# Altium PCB PCB1.PcbDoc (part 1 of 2)
Units mil, origin at the board's own origin, x right, y up, seen from the top; angles counter-clockwise.
Board outline 6000 x 4000 mil, 2 copper layers (Top Layer, Bottom Layer); 229 components, 170 nets, 796 pads, 0 vias.
Unrouted connection lines stored in the file: 461.
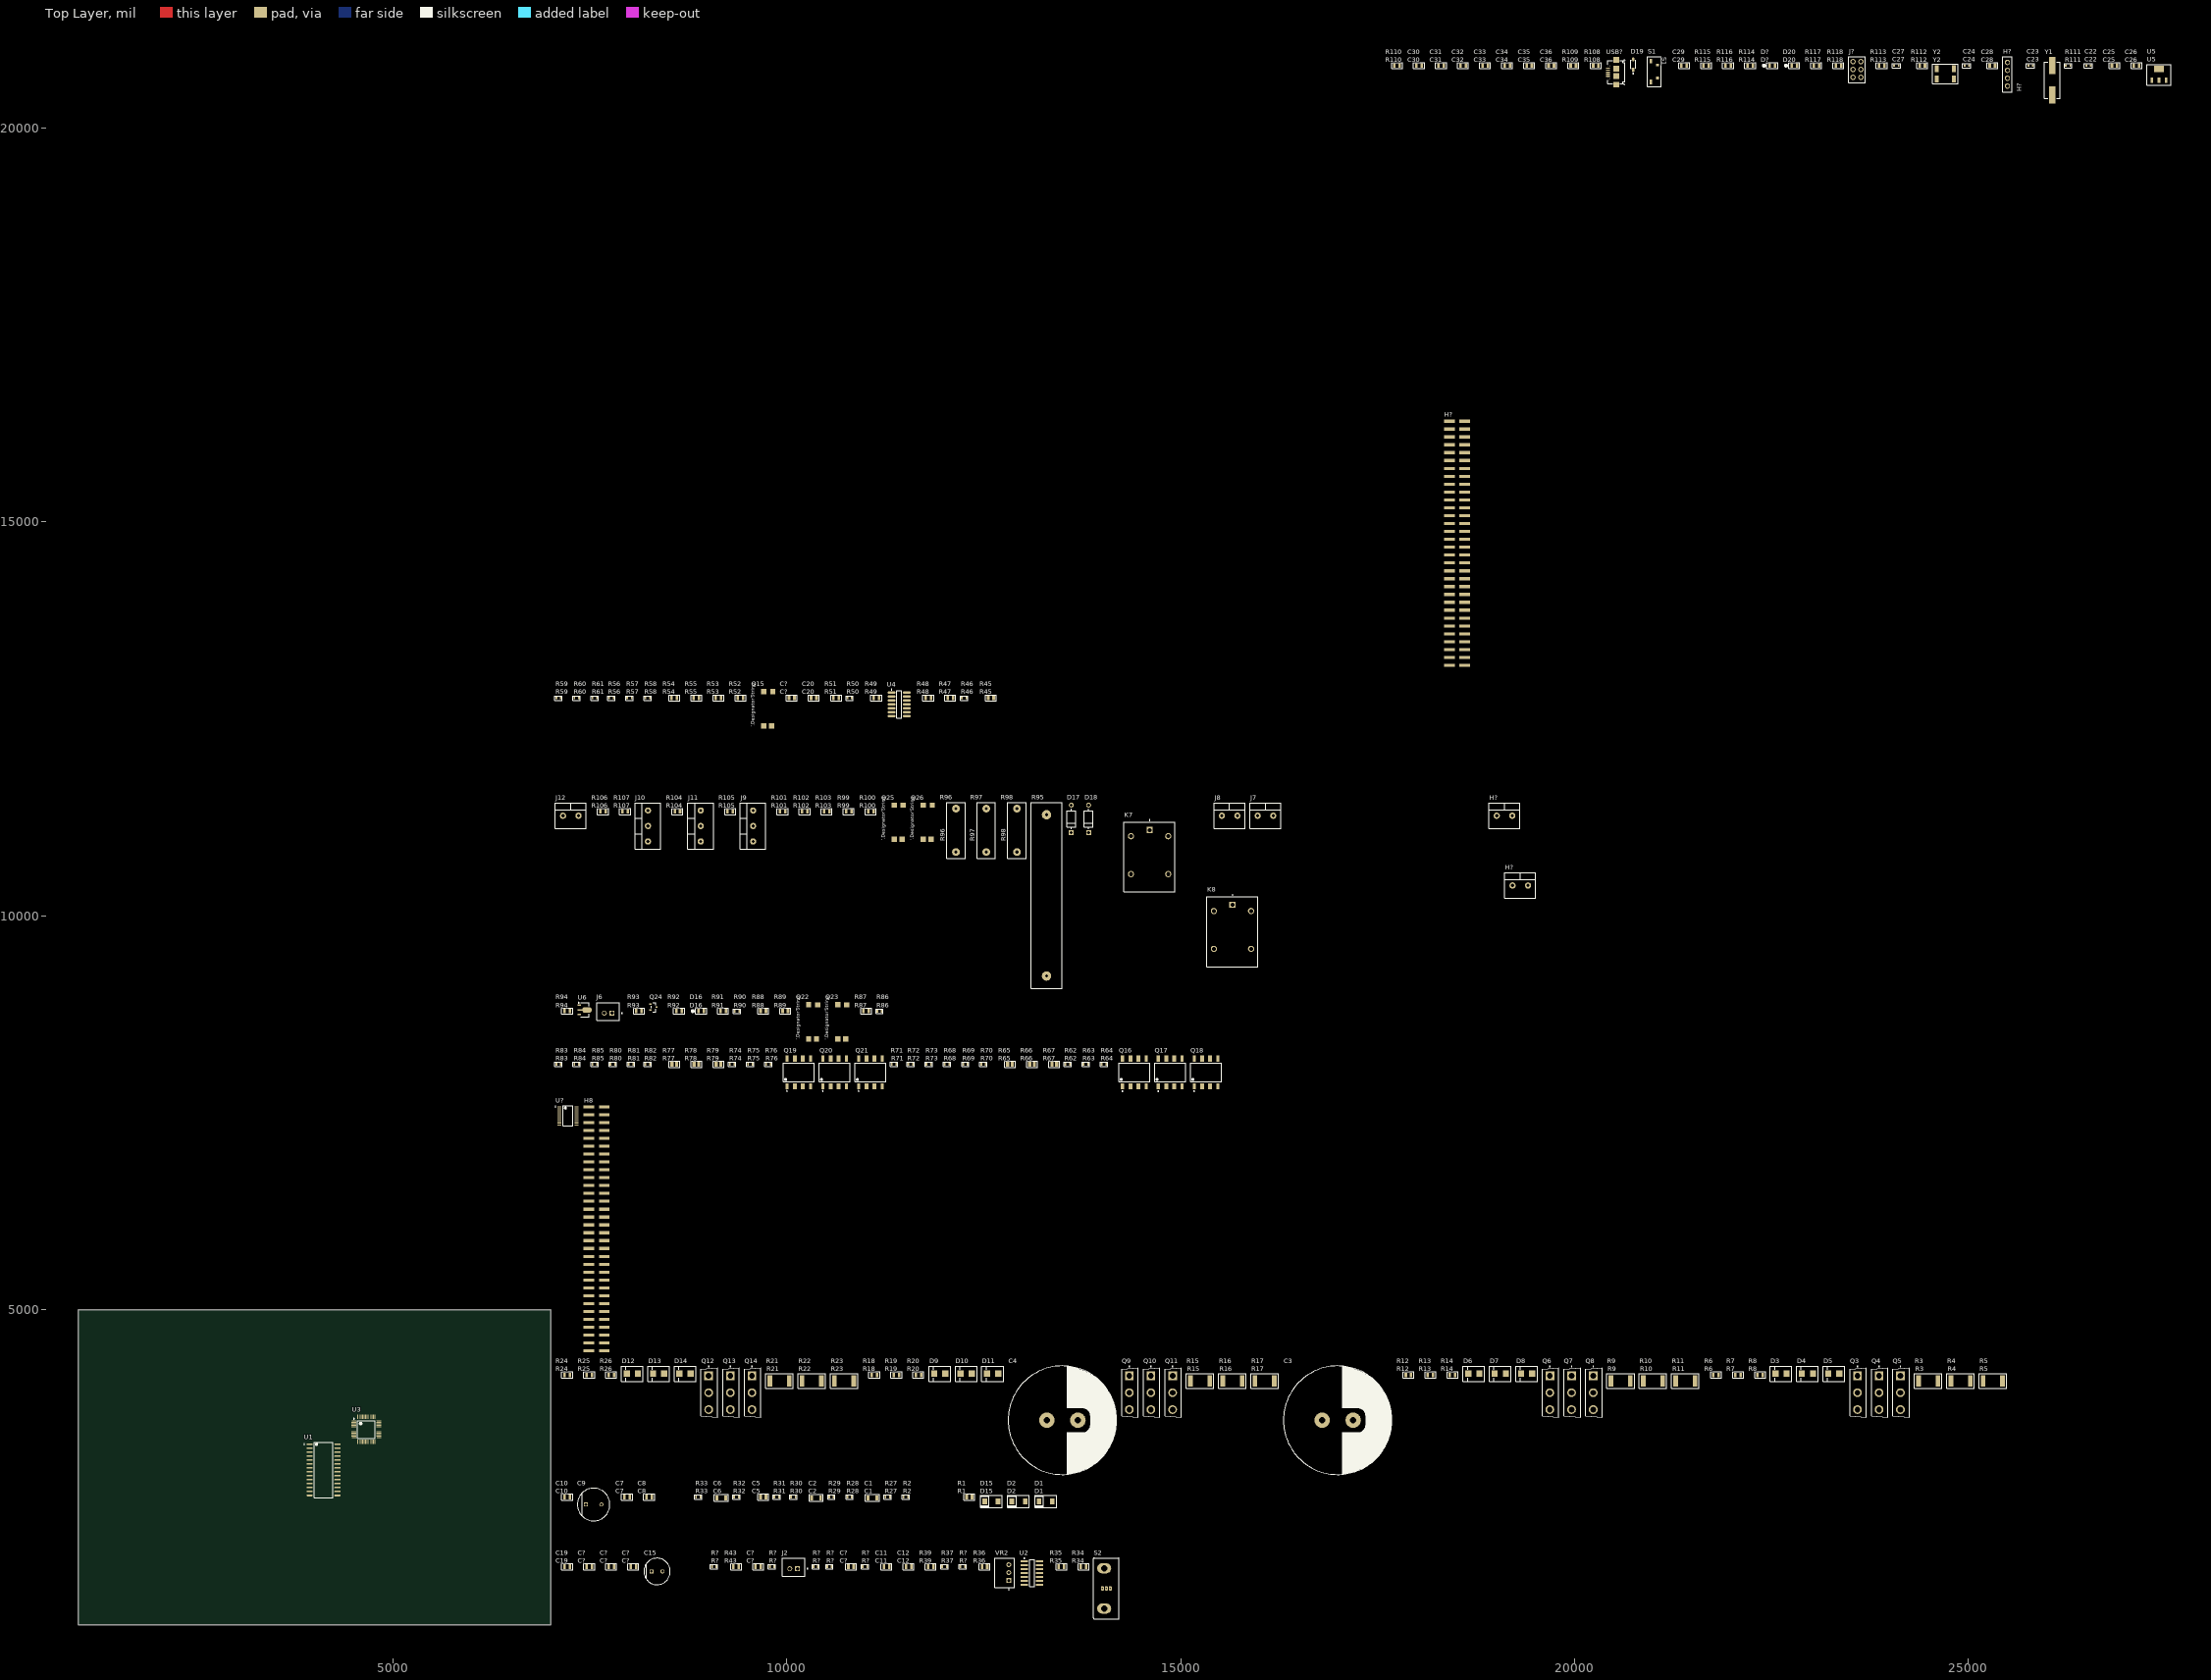
[diagram p0: Top Layer view]
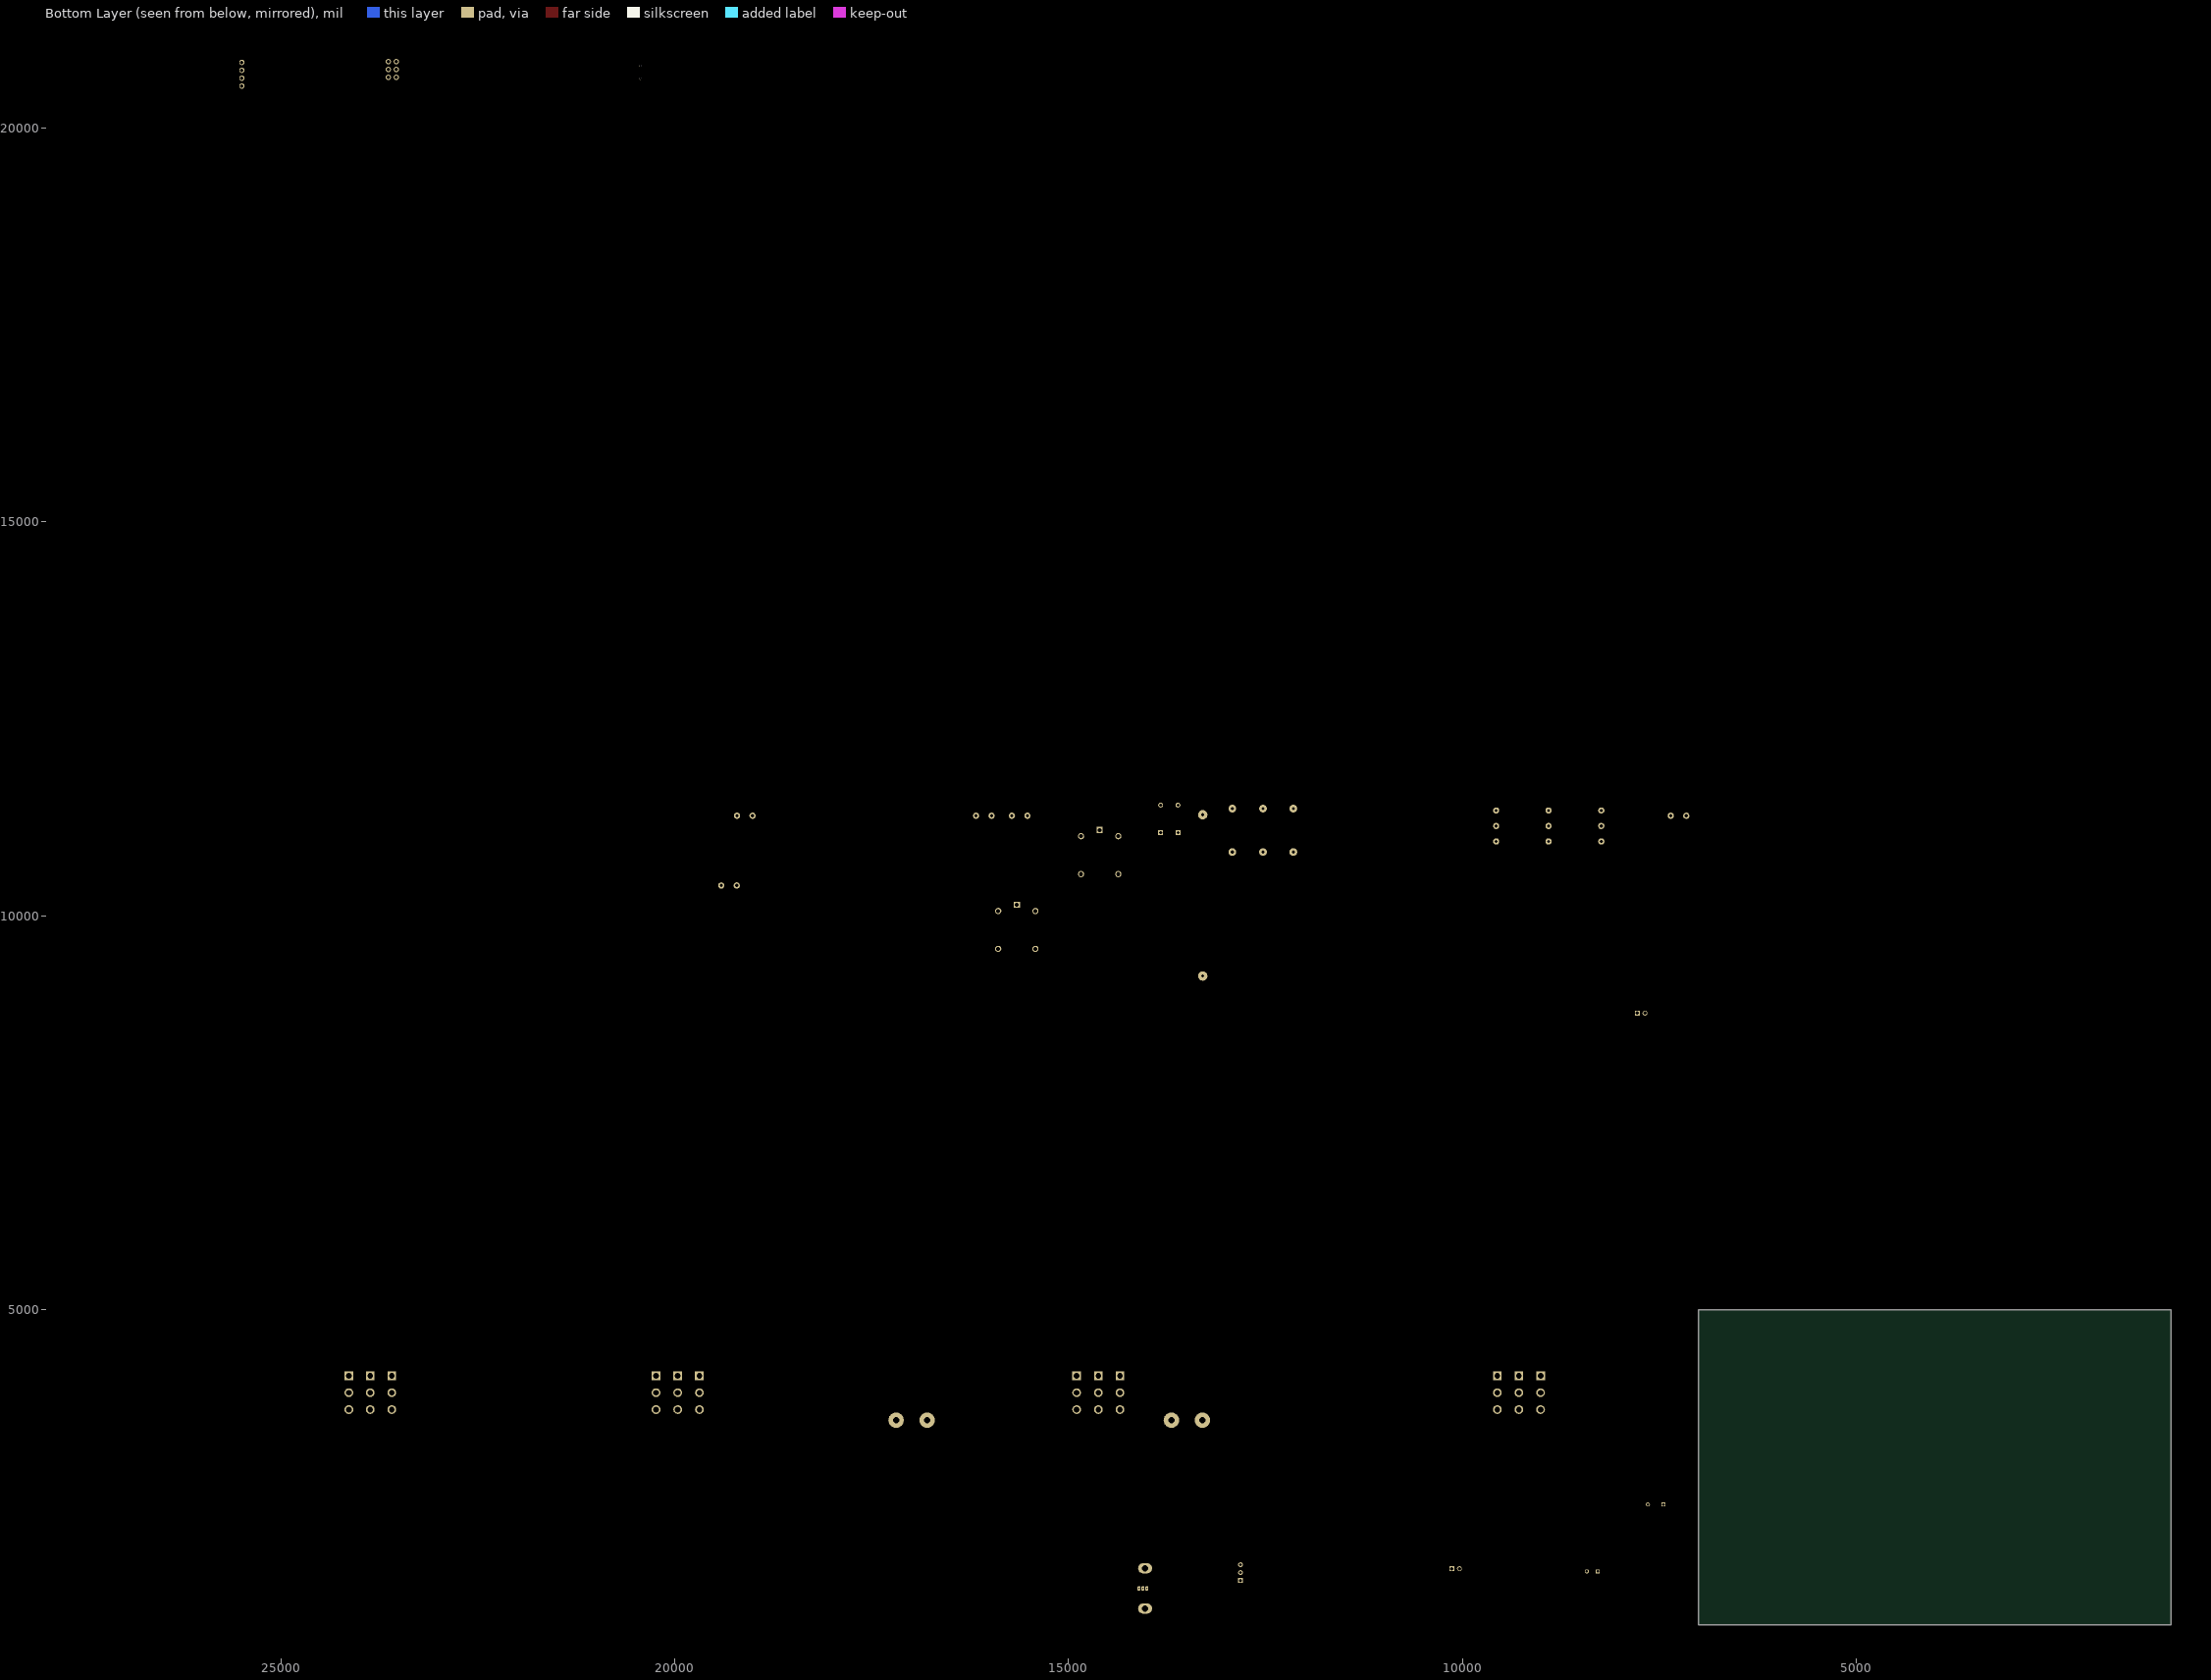
[diagram p1: Bottom Layer view, seen from below]

## Layer stack, top to bottom
Top Solder: solder mask 0.4, Solder Resist, Dk 3.5
Top Layer: signal copper 1.4
Dielectric 1: dielectric 12.6, FR-4, Dk 4.8
Bottom Layer: signal copper 1.4
Bottom Solder: solder mask 0.4, Solder Resist, Dk 3.5

## Board outline
1000,1000 7000,1000 7000,5000 1000,5000

## Design rules (kind name [scope] priority, off if disabled: settings)
Clearance [All] p1: gap=10 ignorepadtopadclearanceinfootprint=FALSE except(0: Arc-Hole Track-Hole SMDPad-Hole THPad-Hole Via-Hole Fill-Hole Poly-Hole Region-Hole Text-Hole)
PolygonConnect [All] p1: connectstyle=Relief reliefconductorwidth=10 reliefentries=4 polygonreliefangle="90 Angle" airgapwidth=10
RoomDefinition Voltage_measurement [InComponentClass('Voltage_measurement')] p1: confinementstyle=ConfineIn formatcopy=TRUE lockcomponents=FALSE outline 7045,1685 12670,1685 12670,12990 7045,12990
RoomDefinition stm32 [InComponentClass('stm32')] p2: confinementstyle=ConfineIn formatcopy=TRUE lockcomponents=FALSE outline 17579.88,10210 28019.88,10210 28019.88,21020 17579.88,21020
RoomDefinition "Precharge circuit" [InComponentClass('Precharge circuit')] p3: confinementstyle=ConfineIn formatcopy=TRUE lockcomponents=FALSE outline 7045,9065 16285,9065 16285,11550 7045,11550
RoomDefinition Optocouplers [InComponentClass('Optocouplers')] p4: confinementstyle=ConfineIn formatcopy=TRUE lockcomponents=FALSE outline 7045,7755 15530,7755 15530,8340 7045,8340
RoomDefinition optocouplers2 [InComponentClass('optocouplers2')] p5: confinementstyle=ConfineIn formatcopy=TRUE lockcomponents=FALSE outline 7045,8390 11315,8390 11315,9015 7045,9015
RoomDefinition mcu [InComponentClass('mcu')] p6: confinementstyle=ConfineIn formatcopy=TRUE lockcomponents=FALSE outline 7045,1505 15155,1505 15155,12315 7045,12315
RoomDefinition HV_Side [InComponentClass('HV_Side')] p7: confinementstyle=ConfineIn formatcopy=TRUE lockcomponents=FALSE outline 7045,2895 25495,2895 25495,4395 7045,4395
RoomDefinition Gate_Driver [InComponentClass('Gate_Driver')] p8: confinementstyle=ConfineIn formatcopy=TRUE lockcomponents=FALSE outline 7045,1505 15155,1505 15155,12315 7045,12315
RoomDefinition Current_measurement [InComponentClass('Current_measurement')] p9: confinementstyle=ConfineIn formatcopy=TRUE lockcomponents=FALSE outline 7045,1060 15155,1060 15155,12990 7045,12990
RoutingVias [All] p1: holewidth=28 width=50 viastyle="Through Hole" minholewidth=28 minwidth=50 maxholewidth=28 maxwidth=50
SolderMaskExpansion [All] p1: expansion=4 istentingtop=FALSE
Width [All] p1: maxlimit=10 minlimit=10 preferedwidth=10
30 further rules are at their usual default settings.

## Classes and differential pairs
component class Voltage_measurement: C20 C? Q15 R45 R46 R47 R48 R49 R50 R51 R52 R53 R54 R55 R56 R57 R58 R59 R60 R61 U4
component class stm32: C22 C23 C24 C25 C26 C27 C28 C29 C30 C31 C32 C33 C34 C35 C36 D19 D20 D? H? J? R108 R109 R110 R111 R112 R113 R114 R115 R116 R117 R118 S1 U3 U5 USB? Y1 Y2
component class "Precharge circuit": D17 D18 J7 J8 J9 J10 J11 J12 K7 K8 Q25 Q26 R95 R96 R97 R98 R99 R100 R101 R102 R103 R104 R105 R106 R107
component class Optocouplers: Q16 Q17 Q18 Q19 Q20 Q21 R62 R63 R64 R65 R66 R67 R68 R69 R70 R71 R72 R73 R74 R75 R76 R77 R78 R79 R80 R81 R82 R83 R84 R85
component class optocouplers2: D16 J6 Q22 Q23 Q24 R86 R87 R88 R89 R90 R91 R92 R93 R94 U6
component class mcu: H8 H? U?
component class HV_Side: C3 C4 D3 D4 D5 D6 D7 D8 D9 D10 D11 D12 D13 D14 Q3 Q4 Q5 Q6 Q7 Q8 Q9 Q10 Q11 Q12 Q13 Q14 R3 R4 R5 R6 R7 R8 R9 R10 R11 R12 R13 R14 R15 R16 R17 R18 R19 R20 R21 R22 R23 R24 R25 R26
component class Gate_Driver: C1 C2 C5 C6 C7 C8 C9 C10 D1 D2 D15 H? R1 R2 R27 R28 R29 R30 R31 R32 R33 U1
component class Current_measurement: C11 C12 C15 C19 C? H? J2 R34 R35 R36 R37 R39 R43 R? S2 U2 VR2

## Components (designator, comment, footprint, x,y, rotation, side; value= is the part's Value field where it differs from the comment)
C1 "0.1uF 1206" C1206 11085,2610 r0 top
C2 "0.1uF 1206" C1206 10370,2610 r0 top
C3 "4700uF 100V" "4700uF 100V" 16795,3595 r0 top
C4 "4700uF 100V" "4700uF 100V" 13300,3595 r0 top
C5 "1uF 0805" R0805 9700,2620 r0 top
C6 "0.1uF 1206" C1206 9165,2610 r0 top
C7 "0.1uF 0805" R0805 7970,2620 r0 top
C8 "10uF 0805" R0805 8250,2620 r0 top
C9 "10uf THT" FP-RAD-TH-D_10_0_5-L_20_2-MFG 7545,2525 r0 top
C10 "0.01uF 0805" R0805 7210,2620 r0 top
C11 "0.01uF 0805" R0805 11265,1735 r0 top
C12 "0.1uF 0805" R0805 11545,1735 r0 top
C15 "100uF 50v" FP-EEU-FR1H101B-MFG 8350,1675 r0 top
C19 "10uF 0805" R0805 7210,1735 r0 top
C20 "0.01uF 0805" R0805 10340,12765 r0 top
C22 "20pF 0603" C0603 26524.88,20795 r0 top
C23 "20pF 0603" C0603 25789.88,20795 r0 top
C24 "20pF 0603" C0603 24979.88,20795 r0 top
C25 "10uF 0805" R0805 26854.88,20795 r0 top
C26 "0.1uF 0805" R0805 27134.88,20795 r0 top
C27 "20pF 0603" C0603 24084.88,20795 r0 top
C28 "0.1uF 0805" R0805 25304.88,20795 r0 top
C29 "1uF 0805" R0805 21389.88,20795 r0 top
C30 "0.1uF 0805" R0805 18024.88,20795 r0 top
C31 "0.1uF 0805" R0805 18304.88,20795 r0 top
C32 "0.1uF 0805" R0805 18584.88,20795 r0 top
C33 "0.1uF 0805" R0805 18864.88,20795 r0 top
C34 "0.1uF 0805" R0805 19144.88,20795 r0 top
C35 "1uF 0805" R0805 19424.88,20795 r0 top
C36 "10uF 0805" R0805 19704.88,20795 r0 top
C? "0.1uF 0805" R0805 10815,1735 r0 top
C? "0.01uF 0805" R0805 8050,1735 r0 top
C? "0.1uF 0805" R0805 9635,1735 r0 top
C? "0.1uF 0805" R0805 10060,12765 r0 top
C? "0.1uF 0805" R0805 7770,1735 r0 top
C? "0.01uF 0805" R0805 7490,1735 r0 top
D1 "SS510" DO-210AA 13285,2565 r0 top
D2 "SS510" DO-210AA 12940,2565 r0 top
D3 "SS34" DO-214AC 22550,4185 r0 top
D4 "SS34" DO-214AC 22885,4185 r0 top
D5 "SS34" DO-214AC 23220,4185 r0 top
D6 "SS34" DO-214AC 18650,4185 r0 top
D7 "SS34" DO-214AC 18985,4185 r0 top
D8 "SS34" DO-214AC 19320,4185 r0 top
D9 "SS34" DO-214AC 11870,4185 r0 top
D10 "SS34" DO-214AC 12205,4185 r0 top
D11 "SS34" DO-214AC 12540,4185 r0 top
D12 "SS34" DO-214AC 7965,4185 r0 top
D13 "SS34" DO-214AC 8300,4185 r0 top
D14 "SS34" DO-214AC 8635,4185 r0 top
D15 "SS510" DO-210AA 12595,2565 r0 top
D16 "LED-0805" LED0805 8910,8790 r0 top
D17 "1N4007" FP-1N4007-MFG 13610,11230 r90 top value=15pF
D18 "1N4007" FP-1N4007-MFG 13830,11230 r90 top value=15pF
D19 "1N5819HW-7-F" FP-SOD123-IPC_B 20744.88,20810 r90 top
D20 "LED-0805" LED0805 22789.88,20795 r0 top
D? "LED-0805" LED0805 22509.88,20795 r0 top
H8 "2.54MM 32P HEADER" "2.5mm 32p header" 7680,4475 r90 top
H? "5mm 2P Header" TERMINAL_5MM_2P 19109.88,11270 r0 top
H? "5mm 2P Header" TERMINAL_5MM_2P 19309.88,10385 r0 top
H? "2.54mm 4p header" "2.54mm 4p header" 25494.88,20685 r0 top
H? "2.54MM 32P HEADER" "2.5mm 32p header" 18604.88,13180 r90 top
J2 "10k NTC" XH2.5-2p 10135,1710 r0 top
J6 "10k NTC" XH2.5-2p 7780,8765 r0 top
J7 "PRECHRG_IN" TERMINAL_5MM_2P 16075,11270 r0 top
J8 "CONTACTOR_EN" TERMINAL_5MM_2P 15620,11270 r0 top
J9 "HALL_IN" TERMINAL_5MM_3P 9570,11140 r90 top
J10 "THROTTLE" TERMINAL_5MM_3P 8235,11140 r90 top
J11 "3p 5mm screw terminal" TERMINAL_5MM_3P 8905,11140 r90 top
J12 "HALL_PWR" TERMINAL_5MM_2P 7255,11270 r0 top
J? "2.54mm berg 3p" "2.54mm 3p header" 23584.88,20745 r0 top
K7 "5v/10A spdt" FP-G5LE-1-E-36-DC5-MFG 14603.78,10746.22 r90 top
K8 "5v/10A spdt" FP-G5LE-1-E-36-DC5-MFG 15656.22,9796.54 r90 top
Q3 "IRFP260NPBF" FP-PG-TO247-3-MFG 23600,3945 r0 top
Q4 "IRFP260NPBF" FP-PG-TO247-3-MFG 23875,3945 r0 top
Q5 "IRFP260NPBF" FP-PG-TO247-3-MFG 24145,3945 r0 top
Q6 "IRFP260NPBF" FP-PG-TO247-3-MFG 19695,3945 r0 top
Q7 "IRFP260NPBF" FP-PG-TO247-3-MFG 19970,3945 r0 top
Q8 "IRFP260NPBF" FP-PG-TO247-3-MFG 20245,3945 r0 top
Q9 "IRFP260NPBF" FP-PG-TO247-3-MFG 14355,3945 r0 top
Q10 "IRFP260NPBF" FP-PG-TO247-3-MFG 14630,3945 r0 top
Q11 "IRFP260NPBF" FP-PG-TO247-3-MFG 14905,3945 r0 top
Q12 "IRFP260NPBF" FP-PG-TO247-3-MFG 9015,3945 r0 top
Q13 "IRFP260NPBF" FP-PG-TO247-3-MFG 9290,3945 r0 top
Q14 "IRFP260NPBF" FP-PG-TO247-3-MFG 9565,3945 r0 top
Q15 "EL817S1" EL817S1 9705,12410 r90 top
Q16 "6N137-300E" FP-6N137-300E-MFG 14410,8010 r0 top
Q17 "6N137-300E" FP-6N137-300E-MFG 14865,8010 r0 top
Q18 "6N137-300E" FP-6N137-300E-MFG 15320,8010 r0 top
Q19 "6N137-300E" FP-6N137-300E-MFG 10150,8010 r0 top
Q20 "6N137-300E" FP-6N137-300E-MFG 10605,8010 r0 top
Q21 "6N137-300E" FP-6N137-300E-MFG 11060,8010 r0 top
Q22 "EL817S1" EL817S1 10275,8435 r90 top
Q23 "EL817S1" EL817S1 10645,8435 r90 top
Q24 "SI2300DS-T1-GE3" FP-S-03946-MFG 8305,8840 r0 top
Q25 "EL817S1" EL817S1 11360,10970 r90 top
Q26 "EL817S1" EL817S1 11730,10970 r90 top
R1 "1K 0805" R0805 12315,2620 r0 top
R2 "0R 0603" R0603 11510,2620 r0 top
R3 "1k 2512" R2512 24490,4095 r0 top
R4 "1k 2512" R2512 24900,4095 r0 top
R5 "1k 2512" R2512 25310,4095 r0 top
R6 "10k 0805" R0805 21795,4170 r0 top
R7 "10k 0805" R0805 22075,4170 r0 top
R8 "10k 0805" R0805 22355,4170 r0 top
R9 "1k 2512" R2512 20585,4095 r0 top
R10 "1k 2512" R2512 20995,4095 r0 top
R11 "1k 2512" R2512 21405,4095 r0 top
R12 "10k 0805" R0805 17890,4170 r0 top
R13 "10k 0805" R0805 18170,4170 r0 top
R14 "10k 0805" R0805 18450,4170 r0 top
R15 "1k 2512" R2512 15245,4095 r0 top
R16 "1k 2512" R2512 15655,4095 r0 top
R17 "1k 2512" R2512 16065,4095 r0 top
R18 "10k 0805" R0805 11110,4170 r0 top
R19 "10k 0805" R0805 11390,4170 r0 top
R20 "10k 0805" R0805 11670,4170 r0 top
R21 "1k 2512" R2512 9905,4095 r0 top
R22 "1k 2512" R2512 10315,4095 r0 top
R23 "1k 2512" R2512 10725,4095 r0 top
R24 "10k 0805" R0805 7210,4170 r0 top
R25 "10k 0805" R0805 7490,4170 r0 top
R26 "10k 0805" R0805 7770,4170 r0 top
R27 "0R 0603" R0603 11280,2620 r0 top
R28 "0R 0603" R0603 10795,2620 r0 top
R29 "0R 0603" R0603 10565,2620 r0 top
R30 "0R 0603" R0603 10080,2620 r0 top
R31 "0R 0603" R0603 9870,2620 r0 top
R32 "0R 0603" R0603 9360,2620 r0 top
R33 "0R 0603" R0603 8875,2620 r0 top
R34 "3k 0805" R0805 13765,1735 r0 top
R35 "12k 0805" R0805 13485,1735 r0 top
R36 "20k 0805" R0805 12510,1735 r0 top
R37 "0R 0603" R0603 12000,1735 r0 top
R39 "10k 0805" R0805 11825,1735 r0 top
R43 "10k 0805" R0805 9355,1735 r0 top
R45 "20k 0805" R0805 12590,12765 r0 top
R46 "0R 0603" R0603 12250,12765 r0 top
R47 "20k 0805" R0805 12075,12765 r0 top
R48 "20k 0805" R0805 11795,12765 r0 top
R49 "20k 0805" R0805 11135,12765 r0 top
R50 "0R 0603" R0603 10795,12765 r0 top
R51 "10k 0805" R0805 10625,12765 r0 top
R52 "5.1k 0805" R0805 9410,12765 r0 top
R53 "5.1k 0805" R0805 9130,12765 r0 top
R54 "100R 0805" R0805 8570,12765 r0 top
R55 "10k 0805" R0805 8850,12765 r0 top
R56 "0R 0603" R0603 7770,12765 r0 top
R57 "0R 0603" R0603 8000,12765 r0 top
R58 "0R 0603" R0603 8230,12765 r0 top
R59 "0R 0603" R0603 7100,12765 r0 top
R60 "0R 0603" R0603 7330,12765 r0 top
R61 "0R 0603" R0603 7560,12765 r0 top
R62 "0R 0603" R0603 13565,8115 r0 top
R63 "0R 0603" R0603 13795,8115 r0 top
R64 "0R 0603" R0603 14025,8115 r0 top
R65 "180R 0402" R08050402 12830,8115 r0 top
R66 "180R 0402" R08050402 13110,8115 r0 top
R67 "180R 0402" R08050402 13395,8115 r0 top
R68 "0R 0603" R0603 12030,8115 r0 top
R69 "0R 0603" R0603 12265,8115 r0 top
R70 "0R 0603" R0603 12495,8115 r0 top
R71 "0R 0603" R0603 11360,8115 r0 top
R72 "0R 0603" R0603 11570,8115 r0 top
R73 "0R 0603" R0603 11800,8115 r0 top
R74 "0R 0603" R0603 9305,8115 r0 top
R75 "0R 0603" R0603 9535,8115 r0 top
R76 "0R 0603" R0603 9765,8115 r0 top
R77 "180R 0402" R08050402 8570,8115 r0 top
R78 "180R 0402" R08050402 8850,8115 r0 top
R79 "180R 0402" R08050402 9130,8115 r0 top
R80 "0R 0603" R0603 7790,8115 r0 top
R81 "0R 0603" R0603 8020,8115 r0 top
R82 "0R 0603" R0603 8230,8115 r0 top
R83 "0R 0603" R0603 7100,8115 r0 top
R84 "0R 0603" R0603 7330,8115 r0 top
R85 "0R 0603" R0603 7560,8115 r0 top
R86 "0R 0603" R0603 11175,8790 r0 top
R87 "10k 0805" R0805 11005,8790 r0 top
R88 "100R 0805" R0805 9700,8790 r0 top
R89 "150R 0805" R0805 9980,8790 r0 top
R90 "0R 0603" R0603 9365,8790 r0 top
R91 "82R 0805" R0805 9190,8790 r0 top
R92 "200R 0805" R0805 8630,8790 r0 top
R93 "1K 0805" R0805 8120,8790 r0 top
R94 "10k 0805" R0805 7210,8790 r0 top
R95 "10k 10W THT" R10W 13295,9235 r90 top
R96 "220R 1W THT" R1WTHT 12145,11085 r90 top
R97 "220R 1W THT" R1WTHT 12530,11085 r90 top
R98 "220R 1W THT" R1WTHT 12920,11085 r90 top
R99 "100R 0805" R0805 10785,11325 r0 top
R100 "100R 0805" R0805 11065,11325 r0 top
R101 "10k 0805" R0805 9945,11325 r0 top
R102 "10k 0805" R0805 10225,11325 r0 top
R103 "10k 0805" R0805 10505,11325 r0 top
R104 "10k 0805" R0805 8610,11325 r0 top
R105 "10k 0805" R0805 9280,11325 r0 top
R106 "10k 0805" R0805 7665,11325 r0 top
R107 "10k 0805" R0805 7945,11325 r0 top
R108 "22R 0805" R0805 20269.88,20795 r0 top
R109 "22R 0805" R0805 19984.88,20795 r0 top
R110 "1.5k 0805" R0805 17744.88,20795 r0 top
R111 "1M 0603" R0603 26264.88,20795 r0 top
R112 "10k 0805" R0805 24414.88,20795 r0 top
R113 "10k 0805" R0805 23899.88,20795 r0 top
R114 "10k 0805" R0805 22229.88,20795 r0 top
R115 "510R 0805" R0805 21669.88,20795 r0 top
R116 "510R 0805" R0805 21949.88,20795 r0 top
R117 "100k 0805" R0805 23069.88,20795 r0 top
R118 "100k 0805" R0805 23349.88,20795 r0 top
R? "0R 0603" R0603 10540,1735 r0 top
R? "0R 0603" R0603 10990,1735 r0 top
R? "0R 0603" R0603 9810,1735 r0 top
R? "0R 0603" R0603 9075,1735 r0 top
R? "0R 0603" R0603 10365,1735 r0 top
R? "0R 0603" R0603 12230,1735 r0 top
S1 "Push Button" PBUTTON 21009.88,20720 r90 top
S2 "WCS1600" WCS1600 14055,1460 r90 top
U1 "IR2136SPBF" FP-PG-DSO-28-IPC_C 4116.3,2965 r0 top
U2 "MCP6004-I/SL" SOIC-SL14_M 13110,1655 r0 top
U3 "STM32F103C8T6" STM-LQFP48_L 4660,3480 r0 top
U4 "MCP6004-I/SL" SOIC-SL14_M 11425,12685 r0 top
U5 "AMS1117-3V3" AMS1117-3V3 27419.88,20680 r0 top
U6 "L78L12A" SOT-89_L 7430,8805 r0 top
U? "TXS0108EPWR" FP-PW0020A-IPC_C 7220,7460 r0 top
USB? "629105136821" 629105136821 20529.88,20710 r90 top
VR2 "10k pot" BOUR-3299W-3_V 12765,1660 r90 top
Y1 "8MHz" FOX-HC49SDLF_V 26064.88,20610 r90 top
Y2 "32.768 Khz" XTAL 24704.88,20690 r0 top

## Footprints (in the part's own frame and the unit in brackets; to place one, negate y for a bottom-side part, rotate by r counter-clockwise, add the part's x,y. Pads: shape width x height; smd on the part's side, far side on the other; paste and mask are expansions set on the pad)
"2.5mm 32p header" [mm]
  rect 1x3.45 smd: 1(0,0) 2(2.54,0) 3(5.08,0) 4(7.62,0) 5(10.16,0) 6(12.7,0) 7(15.24,0) 8(17.78,0) 9(20.32,0) 10(22.86,0) 11(25.4,0) 12(27.94,0) 13(30.48,0) 14(33.02,0) 15(35.56,0) 16(38.1,0) 17(40.64,0) 18(43.18,0) 19(45.72,0) 20(48.26,0) 21(50.8,0) 22(53.34,0) 23(55.88,0) 24(58.42,0) 25(60.96,0) 26(63.5,0) 27(66.04,0) 28(68.58,0) 29(71.12,0) 30(73.66,0) 31(76.2,0) 32(78.74,0) 33(78.74,4.95) 34(76.2,4.95) 35(73.66,4.95) 36(71.12,4.95) 37(68.58,4.95) 38(66.04,4.95) 39(63.5,4.95) 40(60.96,4.95) 41(58.42,4.95) 42(55.88,4.95) 43(53.34,4.95) 44(50.8,4.95) 45(48.26,4.95) 46(45.72,4.95) 47(43.18,4.95) 48(40.64,4.95) 49(38.1,4.95) 50(35.56,4.95) 51(33.02,4.95) 52(30.48,4.95) 53(27.94,4.95) 54(25.4,4.95) 55(22.86,4.95) 56(20.32,4.95) 57(17.78,4.95) 58(15.24,4.95) 59(12.7,4.95) 60(10.16,4.95) 61(7.62,4.95) 62(5.08,4.95) 63(2.54,4.95) 64(0,4.95)
"2.54mm 3p header" [mm]
  round 1.7 hole 1.1: 1(-1.27,-2.54) 1(-1.27,0) 1(-1.27,2.54) 2(1.27,-2.54) 2(1.27,0) 2(1.27,2.54)
  silkscreen extent -2.66,-4.19 2.66,4.19
"2.54mm 4p header" [mm]
  round 1.7 hole 1.1: 1(0,3.81) 2(0,1.27) 3(0,-1.27) 4(0,-3.81)
  silkscreen extent -1.45,-5.68 1.45,5.68
"4700uF 100V" [mm]
  round 5 hole 2: 1(0,0) 2(10,0)
  silkscreen extent -12.5,-17.5 22.5,17.5
629105136821 [mm] "Micro USB 2.0 SMT Type B Horizontal 5 Contacts"
  rect 0.4x1.35 smd: 1(-1.3,2.675) 2(-0.65,2.675) 3(0,2.675) 4(0.65,2.675) 5(1.3,2.675)
  round 0.7 hole 0.7 unplated: MH1(-2.075,2.45) MH2(2.075,2.45)
  rect 1.8x1.9 smd: Shell(-4,0) Shell(4,0)
  rect 1.9x1.9 smd: Shell(-1.2,0) Shell(1.2,0)
  silkscreen extent -4,-2.75 4,2.85, body extent -4,-2.73 4,3.17, height 2.69
AMS1117-3V3 [mm]
  rect 0.84x1.8 smd: 1(-2.29,-1.8) 2(0,-1.8) 3(2.29,-1.8)
  rect 3.15x2 smd: 4(0,1.8)
  silkscreen extent -3.91,-3.31 3.91,3.31
BOUR-3299W-3_V [mm] "TH, 3-Leads, Body 9.53x6.4mm, Pitch 2.54mm"
  rect 1.55x1.55 hole 1.05: 1(-2.54,-1.29)
  round 1.55 hole 1.05: 2(0,-1.29) 3(2.54,-1.29)
  silkscreen extent -5.54,-3.2 4.76,3.2, body extent -4.76,-3.2 4.76,3.2, height 11.55
C0603 [mm] "0603 Capacitor Package"
  rect 0.6x0.9 smd: 1(-0.75,0) 2(0.75,0)
  silkscreen extent -1.35,-0.7 1.35,0.7
C1206 [mm] "1206 Package"
  rect 0.9x1.6 smd: 1(-1.45,0) 2(1.45,0)
  silkscreen extent -2.25,-1.12 2.25,1.13
DO-210AA [mm] "DO-210AA Package"
  rect 1.5x2 smd: 1(-2.15,0) 2(2.15,0)
  silkscreen extent -3.5,-2 3.5,2
DO-214AC [mm] "SMA"
  rect 2x2.1 smd: 1(0,0) 2(3.6,0)
  silkscreen extent -1.7,-2.5 5.3,2.5
EL817S1 [mm] "Optocoupler"
  rect 1.68x1.71 smd: 1(0,0) 2(0,-2.54) 3(11.049,-2.921) 4(11.06,0)
FOX-HC49SDLF_V [mm] "SMD, 2-Leads, Body 5x11.7mm"
  rect 5.5x2 smd: 1(-4.75,0) 2(4.75,0)
  silkscreen extent -5.85,-2.5 5.85,2.5, body extent -6.15,-2.35 6.15,2.35, height 4.34
FP-1N4007-MFG [mm]
  rect 1.55x1.55 hole 1 paste-1000 mask+0: 1(-4.44,0)
  round 1.55 hole 1 paste-1000 mask+0: 2(4.44,0)
  silkscreen extent -3.26,-1.4 3.26,1.4, body extent -5.32,-1.5 5.32,1.5, height 0.25
FP-6N137-300E-MFG [mm]
  rect 1.016x2 smd paste+0 mask+0: 1(-3.81,-4.45) 4(3.81,-4.45) 5(3.81,4.45) 8(-3.81,4.45)
  rect 1.27x2 smd paste+0 mask+0: 2(-1.27,-4.45) 3(1.27,-4.45) 6(1.27,4.45) 7(-1.27,4.45)
  silkscreen extent -4.95,-6.12 4.95,3, body extent -5.05,-5.55 5.05,5.55, height 0.25
FP-EEU-FR1H101B-MFG [mm]
  rect 1.3x1.3 hole 0.8 paste-1000 mask+0: 1(-1.75,0)
  round 1.3 hole 0.8 paste-1000 mask+0: 2(1.75,0)
  silkscreen extent -4.25,-4.25 4.25,4.25, body extent -4.35,-4.35 4.35,4.35, height 0.25
FP-G5LE-1-E-36-DC5-MFG [mm]
  rect 2x2 hole 1.3 paste-1000 mask+0: 1(8.7,0)
  round 2 hole 1.3 paste-1000 mask+0: 2(6.7,6) 3(-5.5,6) 4(-5.5,-6) 5(6.7,-6)
  silkscreen extent -11.25,-8.25 11.97,8.25, body extent -11.35,-8.35 11.35,8.35, height 0.25
FP-PG-DSO-28-IPC_C [mil]
  rect 78.65x20.74 smd paste+0 mask+0: 1(-176.3,325)
  rrect100% 78.65x20.74 smd paste+0 mask+0: 2(-176.3,275) 3(-176.3,225) 4(-176.3,175) 5(-176.3,125) 6(-176.3,75) 7(-176.3,25) 8(-176.3,-25) 9(-176.3,-75) 10(-176.3,-125) 11(-176.3,-175) 12(-176.3,-225) 13(-176.3,-275) 14(-176.3,-325) 15(176.3,-325) 16(176.3,-275) 17(176.3,-225) 18(176.3,-175) 19(176.3,-125) 20(176.3,-75) 21(176.3,-25) 22(176.3,25) 23(176.3,75) 24(176.3,125) 25(176.3,175) 26(176.3,225) 27(176.3,275) 28(176.3,325)
  silkscreen extent -251,-352 117,352, body extent -220,-356 220,356, height 10
FP-PG-TO247-3-MFG [mm]
  rect 2.8x2.8 hole 1.85 paste-1000 mask+0: 1(-0.228,5.46)
  round 2.8 hole 1.85 paste-1000 mask+0: 2(-0.228,0) 3(-0.228,-5.46)
  silkscreen extent -2.66,-8 2.66,8.56, body extent -2.76,-8.16 2.76,8.16, height 0.25
FP-PW0020A-IPC_C [mm]
  rect 1.355x0.341 smd paste+0 mask+0: 1(-2.775,2.925)
  rrect100% 1.355x0.341 smd paste+0 mask+0: 2(-2.775,2.275) 3(-2.775,1.625) 4(-2.775,0.975) 5(-2.775,0.325) 6(-2.775,-0.325) 7(-2.775,-0.975) 8(-2.775,-1.625) 9(-2.775,-2.275) 10(-2.775,-2.925) 11(2.775,-2.925) 12(2.775,-2.275) 13(2.775,-1.625) 14(2.775,-0.975) 15(2.775,-0.325) 16(2.775,0.325) 17(2.775,0.975) 18(2.775,1.625) 19(2.775,2.275) 20(2.775,2.925)
  silkscreen extent -4.15,-3.25 1.6,3.25, body extent -3.55,-3.35 3.55,3.35, height 0.25
FP-RAD-TH-D_10_0_5-L_20_2-MFG [mm]
  rect 1.3x1.3 hole 0.8 paste-1000 mask+0: 1(-2.5,0)
  round 1.3 hole 0.8 paste-1000 mask+0: 2(2.5,0)
  silkscreen extent -5.25,-5.25 5.25,5.25, body extent -5.35,-5.35 5.35,5.35, height 0.25
FP-S-03946-MFG [mil]
  rect 29x22 smd paste+0 mask+0: 1(-39,37.5) 2(-39,-37.5) 3(39,0)
  silkscreen extent -28,-60 28,60, body extent -57,-64 57,64, height 10
FP-SOD123-IPC_B [mil]
  rect 49.51x27.66 smd paste+0 mask+0: 1(-64.98,0)
  rrect100% 49.51x27.66 smd paste+0 mask+0: 2(64.98,0)
  silkscreen extent -119,-31 52,31, body extent -100,-40 100,40, height 10
LED0805 [mm] "LED 0805 Package"
  rect 0.85x1.5 smd: 1(-0.866,0) 2(0.866,0)
  silkscreen extent -2.82,-1 1.76,1
PBUTTON [mm]
  rect 0.9x1 smd: 1(-2.1,-1.05) 2(2.1,-1.05)
  round 1 on Mech1: 1(-1.15,0) 2(1.15,0)
  rect 1.45x0.8 smd: 3(-3.375,1) 3(3.375,1)
  silkscreen extent -4.8,-2.2 4.8,2.2
R1WTHT [mm] "1Watt THT Resistor"
  round 2.5 hole 1: 1(-7,0) 2(7,0)
  silkscreen extent -9,-3 9,3
R10W [mm]
  round 3 hole 1: 1(0,0) 1(52,0)
  silkscreen extent -4,-5 56,5
R0603 [mm] "0603 Package"
  rect 0.6x0.9 smd mask+0.102: 1(-0.75,0) 2(0.75,0)
  silkscreen extent -1.17,-0.72 1.18,0.72
R0805 [mm] "0805 Package"
  rect 0.85x1.5 smd: 1(-0.875,0) 2(0.857,0)
  silkscreen extent -1.75,-1 1.75,1
R2512 [mm] "2512 Package"
  rect 1.5x3.7 smd: 1(-3.125,0) 2(3.125,0)
  silkscreen extent -4.44,-2.41 4.44,2.41
R08050402 [mm] "MOdified 0805"
  rect 1.05x1.5 smd: 1(-0.766,0) 2(0.766,0)
  silkscreen extent -1.74,-1 1.76,1
SOIC-SL14_M [mm] "SOIC, 14-Leads, Body 8.7x3.9mm, Pitch 1.27mm, IPC Low Density"
  oval 2.5x0.7 smd: 1(-2.45,3.81) 2(-2.45,2.54) 3(-2.45,1.27) 4(-2.45,0) 5(-2.45,-1.27) 6(-2.45,-2.54) 7(-2.45,-3.81) 8(2.45,-3.81) 9(2.45,-2.54) 10(2.45,-1.27) 11(2.45,0) 12(2.45,1.27) 13(2.45,2.54) 14(2.45,3.81)
  silkscreen extent -2.57,-4.4 0.8,4.83, body extent -2,-4.38 2,4.38, height 1.75
SOT-89_L [mm] "SOT89, 3-Leads, Body 4.5x2.4 mm, Pitch 1.5mm, Lead Span 4.1mm, IPC High Density"
  rect 1.2x0.5 smd: 1(-1.7,1.5) 3(-1.7,-1.5)
  rect 1.6x0.5 smd: 2(-1.5,0)
  oct 3x1.8 smd: 2(0.8,0)
  silkscreen extent -1.97,-2.3 1.4,2.42, body extent -1.2,-2.3 1.4,2.3, height 1.6
STM-LQFP48_L [mm] "QFP, 48-Leads, Body 7x7mm, Pitch 0.5mm, IPC High Density"
  oval 1.55x0.25 smd: 1(-4.025,2.75) 2(-4.025,2.25) 3(-4.025,1.75) 4(-4.025,1.25) 5(-4.025,0.75) 6(-4.025,0.25) 7(-4.025,-0.25) 8(-4.025,-0.75) 9(-4.025,-1.25) 10(-4.025,-1.75) 11(-4.025,-2.25) 12(-4.025,-2.75) 25(4.025,-2.75) 26(4.025,-2.25) 27(4.025,-1.75) 28(4.025,-1.25) 29(4.025,-0.75) 30(4.025,-0.25) 31(4.025,0.25) 32(4.025,0.75) 33(4.025,1.25) 34(4.025,1.75) 35(4.025,2.25) 36(4.025,2.75)
  oval 0.25x1.55 smd: 13(-2.75,-4.025) 14(-2.25,-4.025) 15(-1.75,-4.025) 16(-1.25,-4.025) 17(-0.75,-4.025) 18(-0.25,-4.025) 19(0.25,-4.025) 20(0.75,-4.025) 21(1.25,-4.025) 22(1.75,-4.025) 23(2.25,-4.025) 24(2.75,-4.025) 37(2.75,4.025) 38(2.25,4.025) 39(1.75,4.025) 40(1.25,4.025) 41(0.75,4.025) 42(0.25,4.025) 43(-0.25,4.025) 44(-0.75,4.025) 45(-1.25,4.025) 46(-1.75,4.025) 47(-2.25,4.025) 48(-2.75,4.025)
  silkscreen extent -4.15,-2.85 2.85,3.55, body extent -3.5,-3.5 3.5,3.5, height 1.6
TERMINAL_5MM_2P [mm] "5mm screw terminal"
  round 2 hole 1: 1(2.5,0) 2(-2.5,0)
  silkscreen extent -5,-4.1 5,4.2
TERMINAL_5MM_3P [mm] "5mm screw terminal"
  round 2 hole 1: 1(5,0) 2(0,0) 2(0,0) 3(-5,0)
  silkscreen extent -7.5,-4.1 7.5,4.2
WCS1600 [mm]
  rrect100% 1.5x1 hole 0.5: 1(0,-1.27) 2(0,0) 3(0,1.27)
  rrect100% 3.3x4.5 hole 2: 4(-6.5,0.7) 5(6.5,0.7)
  silkscreen extent -9.85,-4.15 9.85,4.15
XH2.5-2p [mm]
  rect 1.575x1.575 / inner round 1.575 / far side rect 1.575x1.575 hole 1.05: 1(-0.02,-0.017)
  round 1.575 hole 1.05: 2(-2.52,-0.017)
  silkscreen extent -4.97,-2.37 3.27,3.38, body extent -4.97,-2.37 2.43,3.38, height 7
XTAL [mm]
  rect 1.3x2.2 smd: 1(-2.75,1.675) 2(2.75,-1.675) 3(2.75,1.675) 4(-2.75,-1.675)
  silkscreen extent -4.1,-3.15 4.1,3.15

## Part data
C1 C2 C6: "0.1uF/100nF 50V Capacitor ±10% Tolerance CC1206KRX7R9BB104 – 1206 Package", Datasheet=https://sharvielectronics.com/wp-content/uploads/2020/09/Yageo-smd-Capacitor.pdf, Price per piece=2.22, Product URL=https://sharvielectronics.com/product/0-1uf-100nf-50v-capacitor-%c2%b110-tolerance-cc1206krx7r9bb104-1206-package/
C3 C4: "4700uF 100V Electrolytic Capacitor", ComponentLink1Description="Product URL", ComponentLink1URL=https://sharvielectronics.com/product/4700uf-100v-electrolytic-capacitor/, ComponentLink2Description=Datasheet, Price per piece=185
C5 C29 C35: "1uF/1000nF 50V Capacitor ±10% Tolerance CC0805KKX7R9BB105 – 0805 Package", Datasheet=https://drive.google.com/file/d/1wr2K_YaGqgMtACeU2pC6RWLSxDMrIPxr/view?usp=sharing, Price per piece=2.16, Product URL=https://sharvielectronics.com/product/1uf-1000nf-50v-capacitor-%c2%b110-tolerance-cc0805kkx7r9bb105-0805-package/
C7 C12 C26 C28 C30 C31 C32 C33 C34 C? C? C? C?: "0.1uF/100nF 100V Capacitor ±10% Tolerance CC0805KKX7R0BB104 – 0805 Package", Datasheet=https://drive.google.com/file/d/1wr2K_YaGqgMtACeU2pC6RWLSxDMrIPxr/view?usp=sharing, Price per piece=4.76, Product URL=https://sharvielectronics.com/product/0-1uf-100nf-100v-capacitor-%c2%b110-tolerance-cc0805kkx7r0bb104-0805-package/
C8 C19 C25 C36: "10uF/1000nF 50V Capacitor ±10% Tolerance CC0805KKX5R9BB106 – 0805 Package", Datasheet=https://drive.google.com/file/d/1wr2K_YaGqgMtACeU2pC6RWLSxDMrIPxr/view?usp=sharing, Price per piece=2.85, Product URL=https://sharvielectronics.com/product/10uf-1000nf-50v-capacitor-%c2%b110-tolerance-cc0805kkx5r9bb106-0805-package/
C9: library part CMP-05427-000384-1, "Aluminum Electrolytic Capacitors (Radial Lead Type) 10uF ±20% 350V", Capacitance=10uF, Case/Package=Radial, Max Operating Temperature=105°C, Min Operating Temperature=-25°C, Package Quantity=200, Ripple Current=82mA, Tolerance=20%, Voltage Rating=350V, Construction=RADIAL, Contact Plating=Tin, Datasheet=https://drive.google.com/file/d/1s8SUY3P6K0bBIcG8WC2zo0Wz7jUZ4bD_/view?usp=sharing, Diameter=10mm, Height=20mm, Height - Seated (Max)=0.866inch, Lead Diameter=0.6mm, Lead Pitch=5mm, Lead/Base Style=Straight, Length=20mm, Life (Hours)=2000Hour, Mount="Through Hole", Packaging=Bulk, Price per piece=2.25, Product URL=https://sharvielectronics.com/product/10uf-35v-electrolytic-capacitor-105c-5x11mm-samwha/, Radiation Hardening=No, REACH SVHC="No SVHC", Ripple Current (AC)=82mA, RoHS Compliant=Yes, Series=NHG, Termination=Radial, Voltage Rating (DC)=350V
C10 C11 C20 C? C?: "10nF/0.01uF 50V Capacitor ±10% Tolerance 0805B103K500CT – 0805 Package", Datasheet=https://drive.google.com/file/d/18RHnvRuuuVekgJyOA4l8O3UUaSpuKbHR/view?usp=sharing, Price per piece=2.45, Product URL=https://sharvielectronics.com/product/10nf-0-01uf-50v-capacitor-%c2%b110-tolerance-0805b103k500ct-0805-package/
C15: library part CMP-05427-000020-1, "100uF 50V Electrolytic Capacitor – JWCO", Capacitance=100uF, Case/Package=Radial, ESR (Equivalent Series Resistance)=61mR, Max Operating Temperature=105°C, Min Operating Temperature=-40°C, Package Quantity=1, Ripple Current=870mA, Tolerance=20%, Voltage Rating=50V, Contact Plating=Tin, Datasheet=https://drive.google.com/file/d/1y5PJPaMvWZ3P4wiieSg8-_Hf04MAZeNc/view?usp=sharing, Diameter=8mm, Features="General Purpose", Height=11.5mm, Height - Seated (Max)=0.512inch, Impedance=61mR, Lead Diameter=0.6mm, Lead Free="Lead Free", Lead Pitch=5mm, Length=11.5mm, Life (Hours)=6000Hour, Mount="Through Hole", Packaging="Tape and Reel", Price per piece=4.75, Product URL=https://sharvielectronics.com/product/100uf-50v-electrolytic-capacitor-jwco/, Radiation Hardening=No, REACH SVHC="No SVHC", RoHS Compliant=Yes, Series=FR, Termination=Radial, Voltage Rating (DC)=50V
C22 C23 C24 C27: "20pF/0.02nF 50V Capacitor 5% Tolerance 0603N200J500CT – 0603 Package", Datasheet=https://drive.google.com/file/d/1bI-gbXJF8P1uj18nKMNUbX5Mw9ANXnPN/view?usp=sharing, Price per piece=1.85, Product URL=https://sharvielectronics.com/product/20pf-0-02nf-50v-capacitor-5-tolerance-0603n200j500ct-0603-package/
D1 D2 D15: "SS510-E3/52T – 100V 5A High Voltage Schottky Diode – DO-214AA Package", Datasheet=https://drive.google.com/file/d/1iz5AYn44Er0kaCDKeIane-7fZ44xILG8/view?usp=sharing, Price per piece=12.75, Product URL=https://sharvielectronics.com/product/ss510-e3-52t-100v-5a-high-voltage-schottky-diode-do-214aa-package/
D3 D4 D5 D6 D7 D8 D9 D10 D11 D12 D13 D14: "SS34 SMA 40V/3A Schottky Diode SMD Package-DO-214AC", Forward Current=3A, Manufacturer="Vishay Semiconductors", Manufacturer Part Number=SS34-E3/57T, Max Junction Temp=+150°C, Max Repetitive Reverse Voltage=40V, Max Surge Forward Current=100A, Package=95402, Peak Reverse Current=0.5mA, Temperature="-55°C to +150°C", Temperature Range Low=-55°C, Automotive=No, Category=Diode, ComponentLink2Description=Datasheet, ComponentLink2URL=http://www.vishay.com/docs/88751/ss32.pdf, Datasheet=https://drive.google.com/file/d/1NCTjjzsUDglehHYd-VxKcrmaXziByLRA/view?usp=sharing, Device Class L1="Discrete Semiconductors", Device Class L2=Diodes, Device Class L3="Schottky Diodes", Digikey Description="DIODE SCHOTTKY 40V 3A DO214AB", Footprint Url=http://www.vishay.com/docs/95402/smc.pdf, Height=2.62mm, Lead Free=Yes, Mouser Description="Schottky Diodes & Rectifiers 3.0 Amp 40 Volt", Octopart=https://octopart.com/ss34-e3%2F57t-vishay-39552907, Price per piece=5.75, Product URL=https://sharvielectronics.com/product/ss34-sma-40v-3a-schottky-diode-smd-package-do-214ac/, RoHS=TRUE, Standoff Height=0mm, Temperature Range High=+150°C
D16 D?: "Red LED – 0805 SMD Package – 17-21SURC/S530-A3/TR8", Datasheet=https://drive.google.com/file/d/193qGY45iPx2JlzACJk7ZLn2axHlG04VY/view?usp=sharing, Price per piece=2.32, Product URL=https://sharvielectronics.com/product/red-led-0805-smd-package-17-21surc-s530-a3-tr8/
D17 D18: library part CMP-123542-000001-1, "GOOD-ARK 1N4007 General Purpose Rectifier Diode – DO-41 Package", Capacitance=15pF, Forward Current=1A, Manufacturer=Diotec, Max Junction Temp=+175°C, Max Repetitive Reverse Voltage=1000V, Max Surge Forward Current=27A, Peak Reverse Current=5uA, Temperature="-50°C to +175°C", Temperature Range Low=-50°C, Automotive=No, Category=Diode, ComponentLink2Description=Datasheet, ComponentLink2URL=https://datasheet.octopart.com/1N4007-Diotec-datasheet-62346875.pdf, Datasheet=https://sharvielectronics.com/wp-content/uploads/2020/02/1N4007-Diode-Good-Ark.pdf, Device Class L1="Discrete Semiconductors", Device Class L2=Diodes, Device Class L3="Rectifier Diodes", Height=2.8mm, Ipc Land Pattern Name=DIOAD888W100L520D280, Lead Free=Yes, Manufacturer Part Number=1N4007, Octopart=https://octopart.com/1n4007-diotec-4040411, Package=1N4007, Price per piece=1.29, Product URL=https://sharvielectronics.com/product/good-ark-1n4007-general-purpose-rectifier-diode-do-41-package/, Reverse Voltage=1000V, RoHS=TRUE, Temperature Range High=+175°C
D19: library part CMP-0303-00003-3, "DIODE SCHOTTKY 40V 1A SOD123", Average Rectified Current=1A, Capacitance=110pF, Case/Package=SOD-123-2, Forward Voltage=450mV, Max Forward Surge Current (Ifsm)=25A, Max Operating Temperature=125°C, Max Power Dissipation=450mW, Max Repetitive Reverse Voltage (Vrrm)=40V, Min Operating Temperature=-65°C, Package Quantity=3000, Peak Reverse Current=50uA, Contact Plating=Tin, Current Rating=1A, Datasheet=https://sharvielectronics.com/wp-content/uploads/2022/02/1N5819HW-Schottky-Diodes-SOD-123-Package.pdf\, Element Configuration=Single, Forward Current=1A, Height=1.25mm, Lead Free="Lead Free", Length=2.85mm, Max Reverse Voltage (DC)=40V, Number of Pins=2, Output Current=1A, Packaging="Tape and Reel", Peak Non-Repetitive Surge Current=25A, Polarity=Standard, Price per piece=7.45, Product URL=https://sharvielectronics.com/product/1n5819hw-schottky-diodes-sod-123-package/, Radiation Hardening=No, REACH SVHC="No SVHC", Termination=SMD/SMT, Voltage Rating (DC)=40V, Weight=0.000353oz, Width=1.7mm
D20: "Green LED -0805 SMD Package 17-21/GHC-XS1T2M/3T", Datasheet=https://everlighteurope.com/index.php?controller=attachment&id_attachment=5819, Price per piece=1.85, Product URL=https://sharvielectronics.com/product/green-led-0805-smd-package-17-21-ghc-xs1t2m-3t/
H8 H?: "2×40 Pin Straight Female Berg Strip- 2.54mm Pitch", Datasheet=https://sharvielectronics.com/wp-content/uploads/2020/02/Pin-Straight-Female-Berg-Strip-2.54mm-Pitch.pdf, Price per piece=13, Product URL=https://sharvielectronics.com/product/2x40-pin-straight-female-berg-strip-2-54mm-pitch/
H? H?: "2 Pin Screw Terminal Block RED – 5mm Pitch", Price per piece=6.32, Product URL=https://sharvielectronics.com/product/2-pin-screw-terminal-block-red-5mm-pitch/
H?: "1X40 40 Pin Straight Breakaway Male Header 11mm Height Yellow – 2.54mm Pitch", Datasheet=https://sharvielectronics.com/wp-content/uploads/2023/12/2.54mm-Pin-Header-Single-Row-Straight.pdf, Price per piece=11.85, Product URL=https://sharvielectronics.com/product/1x40-40-pin-straight-breakaway-male-header-11mm-height-yellow-2-54mm-pitch/
J2 J6: library part XH2.5-2p, "2 Pin JST-XH Male Straight 2515 Connector 2.54mm Pitch", Datasheet=https://sharvielectronics.com/wp-content/uploads/2021/01/XH-Connector.pdf, Price per piece=1.65, Product URL=https://sharvielectronics.com/product/2-pin-jst-xh-male-straight-2515-connector-2-54mm-pitch/
J7 J8 J12: library part "2p 5mm screw terminal", "XY127- 2 Pin Screw Terminal- 5mm Pitch", Datasheet=https://sharvielectronics.com/wp-content/uploads/2023/03/XY127.pdf, Price per piece=6.32, Product URL=https://sharvielectronics.com/product/2-pin-screw-terminal-block-red-5mm-pitch/
J9 J10: library part "3p 5mm screw terminal", "XY127- 3 Pin Screw Terminal- 5mm Pitch", Datasheet=https://sharvielectronics.com/wp-content/uploads/2023/03/XY127.pdf, Price per piece=8.35, Product URL=https://sharvielectronics.com/product/xy127-3-pin-screw-terminal-5mm-pitch/
J11: "XY127- 3 Pin Screw Terminal- 5mm Pitch", Datasheet=https://sharvielectronics.com/wp-content/uploads/2023/03/XY127.pdf, Price per piece=8.35, Product URL=https://sharvielectronics.com/product/xy127-3-pin-screw-terminal-5mm-pitch/
J?: "40×2 Pin Male Berg Strip Break Away Header Right Angle- 2.54mm Pitch", Datasheet=https://www.mouser.com/catalog/additional/Amphenol_bwb_bergstik.pdf, Price per piece=12.25, Product URL=https://sharvielectronics.com/product/40x2-pin-male-berg-strip-break-away-header-right-angle-2-54mm-pitch/
K7 K8: library part CMP-08822-000056-1, "HF3FF/005-1ZST – 05V 10A SPDT Relay – Hongfa", Coil Current=72mA, Coil Power=360mW, Coil Resistance=70R, Coil Voltage (DC)=5V, Contact Current Rating=16A, Max Operating Temperature=85°C, Min Operating Temperature=-40°C, Package Quantity=100, Power Consumption=400mW, Coil Type=Non-Latching, Contact Material=Tin, Datasheet=https://drive.google.com/file/d/1_hoLs5DHKocXjc-HuLXelOv-fi3k6HGm/view?usp=sharing, Mount="Through Hole", Operate Time=10ms, Packaging=Tray, Price per piece=29.23, Product URL=https://sharvielectronics.com/product/hf3ff-005-1zst-05v-10a-spdt-relay-hongfa/, Relay Type="General Purpose", Release Time=5ms, Series=G5LE-E, Termination="PC Pin", Throw Configuration=SPDT
Q3 Q4 Q5 Q6 Q7 Q8 Q9 Q10 Q11 Q12 Q13 Q14: library part CMP-32901-000262-1, "MOSFET N-CH 200V 50A TO247AC", Case/Package=TO-247, Continuous Drain Current (ID)=50A, Drain to Source Breakdown Voltage=200V, Drain to Source Resistance=40mR, Gate to Source Voltage (Vgs)=20V, Input Capacitance=4.057nF, Max Operating Temperature=175°C, Max Power Dissipation=300W, Min Operating Temperature=-55°C, Threshold Voltage=4V, Drain to Source Voltage (Vdss)=200V, Element Configuration=Single, Halogen Free="Not Halogen Free", Height=0.799inch, Lead Free="Lead Free", Length=0.625inch, Max Dual Supply Voltage=200V, Mount="Through Hole", Number of Pins=3, Packaging=Bulk, Power Dissipation=300W, Price per piece=110.36, Rds On Max=40mR, REACH SVHC="No SVHC", RoHS Compliant=Yes, Turn-Off Delay Time=55ns, Turn-On Delay Time=17ns, Width=0.209inch
  Q6: ComponentLink1Description="Product URL", ComponentLink1URL=https://sharvielectronics.com/product/irfp260npbf-mosfet-200v-50a-n-channel-power-mosfet-to-247-package/, ComponentLink2Description=Datasheet, ComponentLink2URL=https://drive.google.com/file/d/1_dknK1hQ3iHxK7SVbMXCD2-SqB7tXl_1/view?usp=sharing
Q15 Q22 Q23 Q25 Q26: "EL817S1 (B) (TU) – F Optocoupler SMD-4 Cut Tape", Datasheet=https://sharvielectronics.com/wp-content/uploads/2021/09/EL817-Optocoupler.pdf, Price per piece=7.45, Product URL=https://sharvielectronics.com/product/el817s1-b-tu-f-optocoupler-smd-4-cut-tape/
Q16 Q17 Q18 Q19 Q20 Q21: library part CMP-18400-000015-1, "6N137 – High-Speed Optocoupler-SOP8", Ambient Temperature Range High=+85°C, Ambient Temperature Range Low=-40°C, Forward Current=10mA, Forward Voltage=1.5V, Isolation Voltage=3750Vrms, Manufacturer=Broadcom, Max Supply Voltage=5.5V, Min Supply Voltage=4.5V, Package=0, Reverse Voltage=5V, Temperature="-40°C to +85°C", Automotive=No, Category=Trans, ComponentLink2Description=Datasheet, ComponentLink2URL=https://docs.broadcom.com/docs/AV02-0940EN, Datasheet=https://sharvielectronics.com/wp-content/uploads/2020/11/6n137.pdf, Device Class L1=Optoelectronics, Device Class L2=Optocouplers, Device Class L3=unset, Digikey Description="OPTOISO 3.75KV OPN COLL 8DIP GW", Height=4.455mm, Lead Free=Yes, Manufacturer Part Number=6N137-300E, Mouser Description="High Speed Optocouplers 10 Mb/s 3750Vrms", Octopart=https://octopart.com/6n137-300e-broadcom-71125550, Price per piece=36, Product URL=https://sharvielectronics.com/product/6n137-high-speed-optocoupler-sop8/, RoHS=TRUE, Standoff Height=0.505mm, Temperature Range High=+85°C, Temperature Range Low=-40°C, Turn Off Delay Time=50ns, Turn On Delay Time=48ns
Q24: library part CMP-02550-000182-1, "SI2300DS 30V 3.6A N-Channel Mosfet – SOT-23 Package", Continuous Drain Current=3.1A, Drain to Source Breakdown Voltage=30V, Drain to Source Resistance=0.055Ω, Gate To Source Voltage=12V, Input Capacitace At Vds="320pF @ 15V", Manufacturer=Vishay, Max Forward Diode Voltage=1.2V, Max Junction Temp=+150°C, Package=S-03946, Power Dissipation=1.1W, Pulse Drain Current=15A, Temperature="-55°C to +150°C", Temperature Range Low=-55°C, Typ Forward Diode Voltage=0.8V, Automotive=No, Category=Trans, ComponentLink2Description=Datasheet, ComponentLink2URL=http://www.vishay.com/docs/65701/si2300ds.pdf, Datasheet=https://www.vishay.com/docs/65701/si2300ds.pdf, Depletion Mode=False, Device Class L1="Discrete Semiconductors", Device Class L2=Transistors, Device Class L3=MOSFETs, Digikey Description="MOSFET N-CH 30V 3.6A SOT-23", Drain To Source Voltage=30V, Gate Charge At Vgs="6.5nC @ 10V", Height=1.12mm, Ipc Land Pattern Name=SOT95P237X100-3, Lead Free=Yes, Manufacturer Part Number=SI2300DS-T1-GE3, Mouser Description="MOSFET 30V 3.6A N-CH MOSFET", Number of Channels=1, Number Of N Channels=1, Octopart=https://octopart.com/si2300ds-t1-ge3-vishay-44451512, Price per piece=12.5, Product URL=https://sharvielectronics.com/product/si2300ds-30v-3-6a-n-channel-mosfet-sot-23-package/, Reverse Recovery Charge=5nC, Reverse Recovery Time=11ns, RoHS=TRUE, Rthja Max=90°C/W, Standoff Height=0.01mm, Temperature Range High=+150°C, Threshold Vgs Max=1.5V, Threshold Vgs Min=0.6V, Transconductance=13S, Turn Off Delay Time=15ns, Turn On Delay Time=5ns
R1 R93: library part "1k 0805", "1K Ohm 1/8 Watt Resistor 1% Tolerance 0805S8F1001T5E – 0805 Package", Datasheet=https://drive.google.com/file/d/1rtx85iFJaMrDbsv7PAzG9bTFItPmAE38/view?usp=sharing, Price per piece=0.82, Product URL=https://sharvielectronics.com/product/1k-ohm-1-8-watt-resistor-1-tolerance-0805s8f1001t5e-0805-package/
R2 R27 R28 R29 R30 R31 R32 R33 R37 R46 R50 R56 R57 R58 R59 R60 R61 R62 R63 R64 R68 R69 R70 R71 R72 R73 R74 R75 R76 R80 R81 R82 R83 R84 R85 R86 R90 R? R? R? R? R? R?: library part "R0000 0603", "0 Ohm 1/10 Watt Resistor 1% Tolerance RC0603FR-070RL – 0603 Package", Datasheet=https://drive.google.com/file/d/1pkLQT_RQ1i35oFQcGREpZr7Oy3Ppi-ZT/view?usp=sharing, Price per piece=0.97, Product URL=https://sharvielectronics.com/product/0-ohm-1-10-watt-resistor-1-tolerance-rc0603fr-070rl-0603-package/
R3 R4 R5 R9 R10 R11 R15 R16 R17 R21 R22 R23: library part 1K_2512, "1K Ohm 1W Resistor 2512 Package", Case Code (Imperial)=2512, Case Code (Metric)=6432, Manufacturer="Vishay Dale", Manufacturer Part Number=CRCW25121R00FKEG, Max Operating Temperature=155°C, Max Power Dissipation=1W, Min Operating Temperature=-55°C, Package Quantity=2000, Resistance=1R, Temperature Coefficient=100ppm/°C, Tolerance=1%, Voltage Rating=500V, Case/Package=2512, ComponentLink1Description="Product URL", ComponentLink1URL=https://sharvielectronics.com/product/1k-ohm-1w-resistor-2512-package-pack-of-5/, ComponentLink2Description=Datasheet, Composition="Thick Film", Contact Plating=Tin, Depth=3.15mm, Features="Automotive AEC-Q200", Height=0.6mm, Lead Free="Lead Free", Length=6.3mm, Military Standard=Not, Mount="Surface Mount", Number of Pins=2, Number of Terminations=2, Packaging="Tape and Reel", Power Rating=1W, Price per piece=3.25, Prie per piece=3.25, Product URL=https://sharvielectronics.com/product/1k-ohm-1w-resistor-2512-package-pack-of-5/, Radiation Hardening=No, REACH SVHC="No SVHC", Termination=SMD/SMT, Voltage Rating (DC)=500V, Weight=0.001429oz, Width=0.124inch
R6 R7 R8 R12 R13 R14 R18 R19 R20 R24 R25 R26 R39 R43 R51 R55 R87 R94 R101 R102 R103 R104 R105 R106 R107 R112 R113 R114: "10K Ohm 1/8 Watt Resistor 1% Tolerance RC0805FR-0710KL – 0805 Package", Datasheet=https://drive.google.com/file/d/1pkLQT_RQ1i35oFQcGREpZr7Oy3Ppi-ZT/view?usp=sharing, Price per piece=0.82, Product URL=https://sharvielectronics.com/product/10k-ohm-1-8-watt-resistor-1-tolerance-rc0805fr-0710kl-0805-package/
R34: library part R0805, "3K Ohm 1/8 Watt Resistor 1% Tolerance 0805W8F3001T5E – 0805 Package", Datasheet=https://drive.google.com/file/d/1rtx85iFJaMrDbsv7PAzG9bTFItPmAE38/view?usp=sharing, Price per piece=0.82, Product URL=https://sharvielectronics.com/product/3k-ohm-1-8-watt-resistor-1-tolerance-0805w8f3001t5e-0805-package/
R35: library part R0805, "12K Ohm 1/8 Watt Resistor 1% Tolerance RC0805FR-0712KL – 0805 Package", Datasheet=https://drive.google.com/file/d/1pkLQT_RQ1i35oFQcGREpZr7Oy3Ppi-ZT/view?usp=sharing, Price per piece=0.93, Product URL=https://sharvielectronics.com/product/12k-ohm-1-8-watt-resistor-1-tolerance-rc0805fr-0712kl-0805-package/
R36 R45 R47 R48 R49: library part R0805, "20K ohm 1/8 Watt SMD Resistor 1% Tolerance RC0805FR-0720KL – 0805 Package", Datasheet=https://drive.google.com/file/d/1pkLQT_RQ1i35oFQcGREpZr7Oy3Ppi-ZT/view?usp=sharing, Price per piece=1.15, Product URL=https://sharvielectronics.com/product/20k-ohm-1-8-watt-smd-resistor-1-tolerance-rc0805fr-0720kl-0805-package/
R52 R53: library part R0805, "5.1K Ohm 1/8 Watt Resistor 1% Tolerance 0805S8F5101T5E – 0805 Package", Datasheet=https://drive.google.com/file/d/1rtx85iFJaMrDbsv7PAzG9bTFItPmAE38/view?usp=sharing, Price per piece=1.92, Product URL=https://sharvielectronics.com/product/5-1k-ohm-1-8-watt-resistor-1-tolerance-0805s8f5101t5e-0805-package/
R54 R88 R99 R100: "100 ohm 1/4W Resistor 0805 Package", Price per piece=0.82, Product URL=https://sharvielectronics.com/product/100-ohm-1-4w-resistor-0805-package/
R65 R66 R67 R77 R78 R79: library part R0805-0402, "180 Ohm 1/4 Watt Resistor – 0402 Package", Datasheet=https://sharvielectronics.com/wp-content/uploads/2020/09/smd_Resistor_0603_0805_1206.pdf, Price per piece=0.85, Product URL=https://sharvielectronics.com/product/180-ohm-1-4-watt-resistor-0402-package-pack-of-20/
R89 R115 R116: library part R0805, "510 Ohm 1/8 Watt Resistor 1% Tolerance 0805S8F5100T5E – 0805 Package", Datasheet=https://drive.google.com/file/d/1rtx85iFJaMrDbsv7PAzG9bTFItPmAE38/view, Price per piece=0.85, Product URL=https://sharvielectronics.com/product/510-ohm-1-8-watt-resistor-1-tolerance-0805s8f5100t5e-0805-package/
R91: library part R0805, "82 ohm – 1/4W – Resistor – 0805", Datasheet=https://sharvielectronics.com/wp-content/uploads/2020/09/smd_Resistor_0603_0805_1206.pdf, Price per piece=0.82, Product URL=https://sharvielectronics.com/product/82-ohm-1-4w-resistor-pack-of-20-smd-0805/
R92: library part R0805, "200 Ohm 1/8 Watt Resistor 1% Tolerance 0805W8F2000TE – 0805 Package", Datasheet=https://drive.google.com/file/d/1rtx85iFJaMrDbsv7PAzG9bTFItPmAE38/view?usp=sharing, Price per piece=0.82, Product URL=https://sharvielectronics.com/product/200-ohm-1-8-watt-resistor-1-tolerance-0805w8f2000te-0805-package/
R95: library part 10k_10W_THT, "10K ohm 10W Fusible Cement Resistor", Price per piece=20, Product URL=https://sharvielectronics.com/product/10k-ohm-10w-fusible-cement-resistor/
R96 R97 R98: "220 Ohm 1 Watt Resistor 5% Tolerance", Price per piece=1.46, Product URL=https://sharvielectronics.com/product/220-ohm-1-watt-resistor-5-tolerance/
R108 R109: library part R0805, "22 Ohm 1/8 Watt Resistor 1% Tolerance RC0805FR-0722RL – 0805 Package", Datasheet=https://drive.google.com/file/d/1pkLQT_RQ1i35oFQcGREpZr7Oy3Ppi-ZT/view?usp=sharing, Price per piece=0.82, Product URL=https://sharvielectronics.com/product/22-ohm-1-8-watt-resistor-1-tolerance-rc0805fr-0722rl-0805-package/
R110: library part R0805, "1.5K Ohm 1/8 Watt Resistor 1% Tolerance 0805W8F1501T5E – 0805 Package", Datasheet=https://drive.google.com/file/d/1rtx85iFJaMrDbsv7PAzG9bTFItPmAE38/view?usp=sharing, Price per piece=0.82, Product URL=https://sharvielectronics.com/product/1-5k-ohm-1-8-watt-resistor-1-tolerance-0805w8f1501t5e-0805-package/
R111: library part R0603, "1M Ohm 1/10 Watt Resistor 1% Tolerance RC0603FR-071ML – 0603 Package", Datasheet=https://drive.google.com/file/d/1pkLQT_RQ1i35oFQcGREpZr7Oy3Ppi-ZT/view?usp=sharing, Price per piece=0.87, Product URL=https://sharvielectronics.com/product/1m-ohm-1-10-watt-resistor-1-tolerance-rc0603fr-071ml-0603-package/
R117 R118: library part R0805, "100K Ohm 1/8 Watt Resistor 1% Tolerance 0805W8F1003T5E – 0805 Package", Datasheet=https://drive.google.com/file/d/1rtx85iFJaMrDbsv7PAzG9bTFItPmAE38/view?usp=sharing, Price per piece=0.89, Product URL=https://sharvielectronics.com/product/100k-ohm-1-8-watt-resistor-1-tolerance-0805w8f1003t5e-0805-package/
S1: library part PBUTTON, "TS36CA-0.6 – 2Pin SPST SMD Right Angle Push Button Switch", Datasheet=https://drive.google.com/file/d/11nXDBprwehBhuTnyyi6cyPbdFHQP9C3O/view?usp=sharing, Price per piece=4.52, Product URL=https://sharvielectronics.com/product/ts36ca-0-6-2pin-spst-smd-right-angle-push-button-switch/
S2: "WCS1600 100A Hall Effect Linear Current Sensor", Datasheet=https://sharvielectronics.com/wp-content/uploads/2020/02/WCS1600.pdf, Price per piece=280.67, Product URL=https://sharvielectronics.com/product/wcs1600-100a-hall-effect-linear-current-sensor/
U1: library part CMP-32851-000132-1, "IC GATE DRVR HALF-BRIDGE 28SOIC", Case/Package=SOIC, Max Operating Temperature=150°C, Max Output Current=350mA, Max Supply Voltage=20V, Min Operating Temperature=-40°C, Min Supply Voltage=10V, On-State Resistance=100R, Output Voltage=620V, Package Quantity=25, Channel Type=3-Phase, ComponentLink1Description="New link", Fall Time=75ns, Halogen Free="Halogen Free", Height=0.093inch, Lead Free="Lead Free", Length=0.712inch, Mount="Surface Mount", Number of Channels=6, Number of Drivers=6, Number of Outputs=6, Number of Pins=28, Output Current=350mA, Packaging=Rail/Tube, Price per piece=365, Product URL=https://sharvielectronics.com/product/ir2136-3-phase-bridge-driver/, Propagation Delay=425ns, REACH SVHC="No SVHC", RoHS Compliant=Yes, Series=-, Width=0.299inch
U2 U4: library part CMP-0187-00321-3, "MCP6004 1MHz Rail-to-Rail Operational Amplifier – SOIC-14 Package", Case/Package=SOIC, Input Bias Current=1pA, Input Offset Voltage (Vos)=4.5mV, Max Operating Temperature=85°C, Max Supply Voltage=6V, Min Operating Temperature=-40°C, Min Supply Voltage=1.8V, Nominal Supply Current=100uA, Operating Supply Voltage=5.5V, Output Current=23mA, Package Quantity=57, Power Supply Rejection Ratio (PSRR)=86dB, Voltage Gain=112dB, Amplifier Type="GENERAL PURPOSE", Bandwidth=1MHz, Common Mode Rejection Ratio=60dB, Contact Plating=Tin, Datasheet=https://ww1.microchip.com/downloads/en/DeviceDoc/MCP6001-1R-1U-2-4-1-MHz-Low-Power-Op-Amp-DS20001733L.pdf, Gain Bandwidth Product=1MHz, Height=1.25mm, Input Offset Voltage-Max=4.5mV, Lead Free="Lead Free", Length=8.65mm, Mount="Surface Mount", Number of Amplifiers=4, Number of Channels=4, Number of Circuits=4, Number of Elements=4, Number of Pins=14, Packaging=Rail/Tube, Price per piece=38.45, Product URL=https://sharvielectronics.com/product/mcp6004-1mhz-rail-to-rail-operational-amplifier-soic-14-package/, Radiation Hardening=No, REACH SVHC="No SVHC", RoHS Compliant=Yes, Slew Rate=0.6V/µs, Slew Rate-Nom=0.6V/µs, Supply Current=100uA, Technology=CMOS, Unity Gain Bandwidth Product=1MHz, Width=3.9mm
U3: library part CMP-0237-00215-3, "STM32F103C8T6 ARM Microcontroller – LQFP-48 Package", I/Os (High Current)=37, Operating Frequency(F) (Processor speed) (MHz)=72, Supply Voltage(Vcc) min (V)=2, A/D Converter="2x12-bit (10 Channel)", ComponentLink1Description="Manufacturer URL", ComponentLink1URL=http://www.st.com/web/en/home.html, ComponentLink2Description=Datasheet, ComponentLink2URL=http://www.st.com/st-web-ui/static/active/en/resource/technical/document/datasheet/CD00161566.pdf, ComponentLink3Description="Package Specification", ComponentLink3URL=http://www.st.com/st-web-ui/static/active/en/resource/technical/document/datasheet/DM00058181.pdf, Core="ARM Cortex-M3", Datasheet=https://www.st.com/resource/en/datasheet/stm32f103c8.pdf, DatasheetVersion="Rev. 16", FLASH Size (Prog) (kB)=64, Internal RAM Size (kB)=20, Mounting Technology="Surface Mount", PackageDescription="48-Pin Low Profile Quad Flat Package, 7 x 7 mm Body, 0.5 mm Pitch", PackageReference=LQFP48, PackageVersion="Rev. 6, 06/2013", Packing=Tray, PartNumber=STM32F103C8T6, Price per piece=189.45, Product URL=https://sharvielectronics.com/product/stm32f103c8t6-arm-microcontroller-lqfp-48-package/
U5: "AMS1117 3.3V – Voltage Regulator IC SMD SOT-223 Package", Datasheet=https://sharvielectronics.com/wp-content/uploads/2020/09/AMS1117-3.3V_DS.pdf, Price per piece=6.25, Product URL=https://sharvielectronics.com/product/ams1117-3-3v-voltage-regulator-ic-smd-sot-223-package/